# Altium PCB giro.PcbDoc
Units mm, origin at the board's own origin, x right, y up, seen from the top; angles counter-clockwise.
Board outline 28.43 x 24.86 mm, 2 copper layers (Top Layer, Bottom Layer); 11 components, 10 nets, 42 pads, 0 vias.
Unrouted connection lines stored in the file: 1.
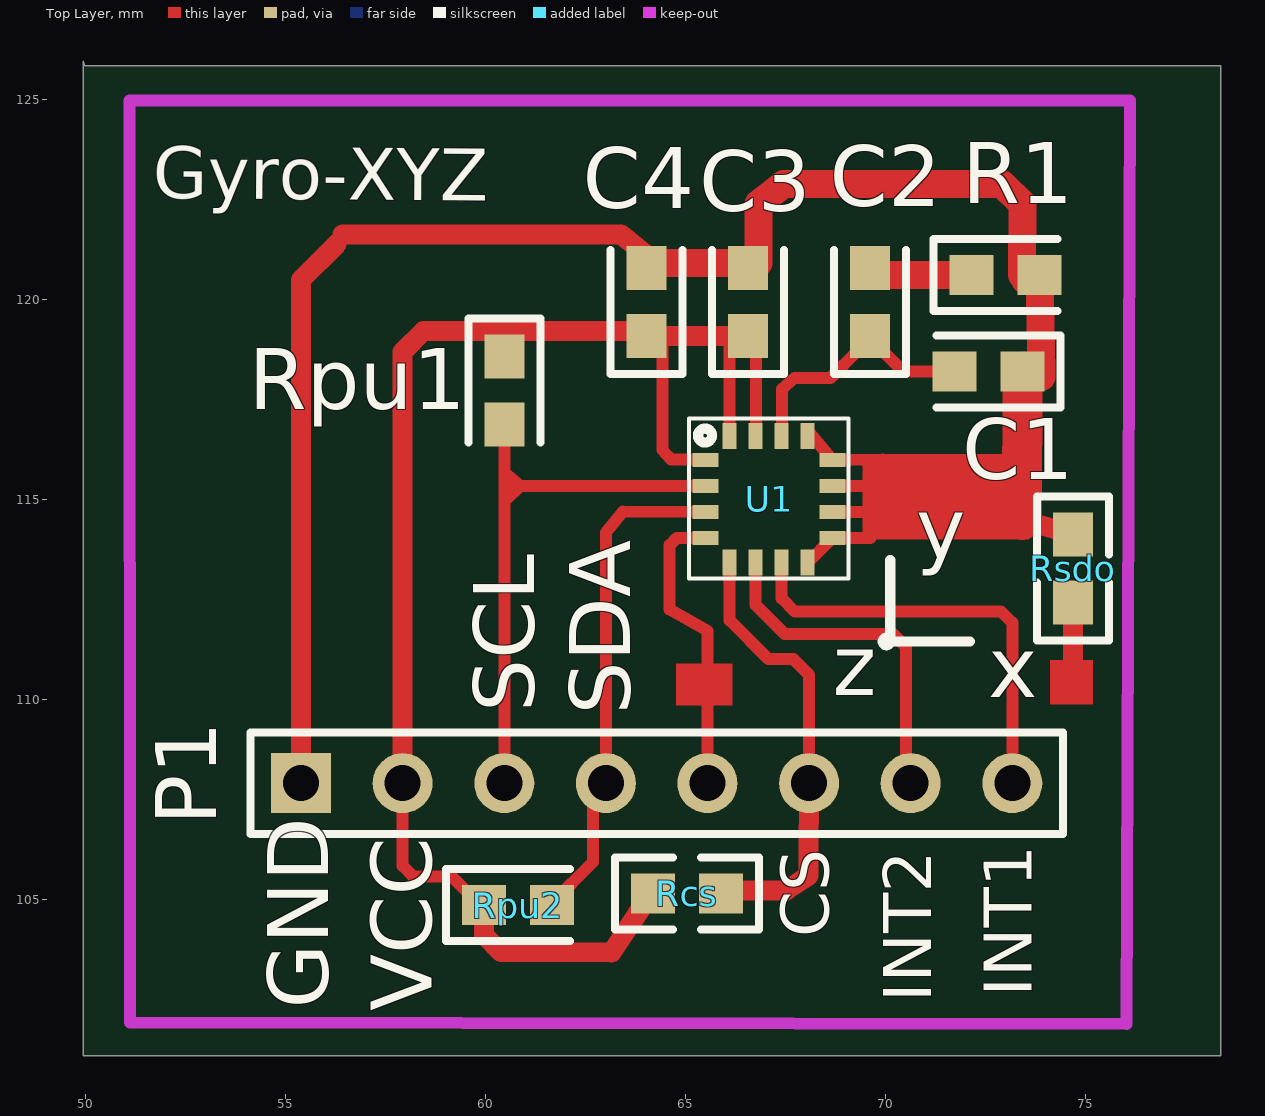
[diagram p0: Top Layer view]
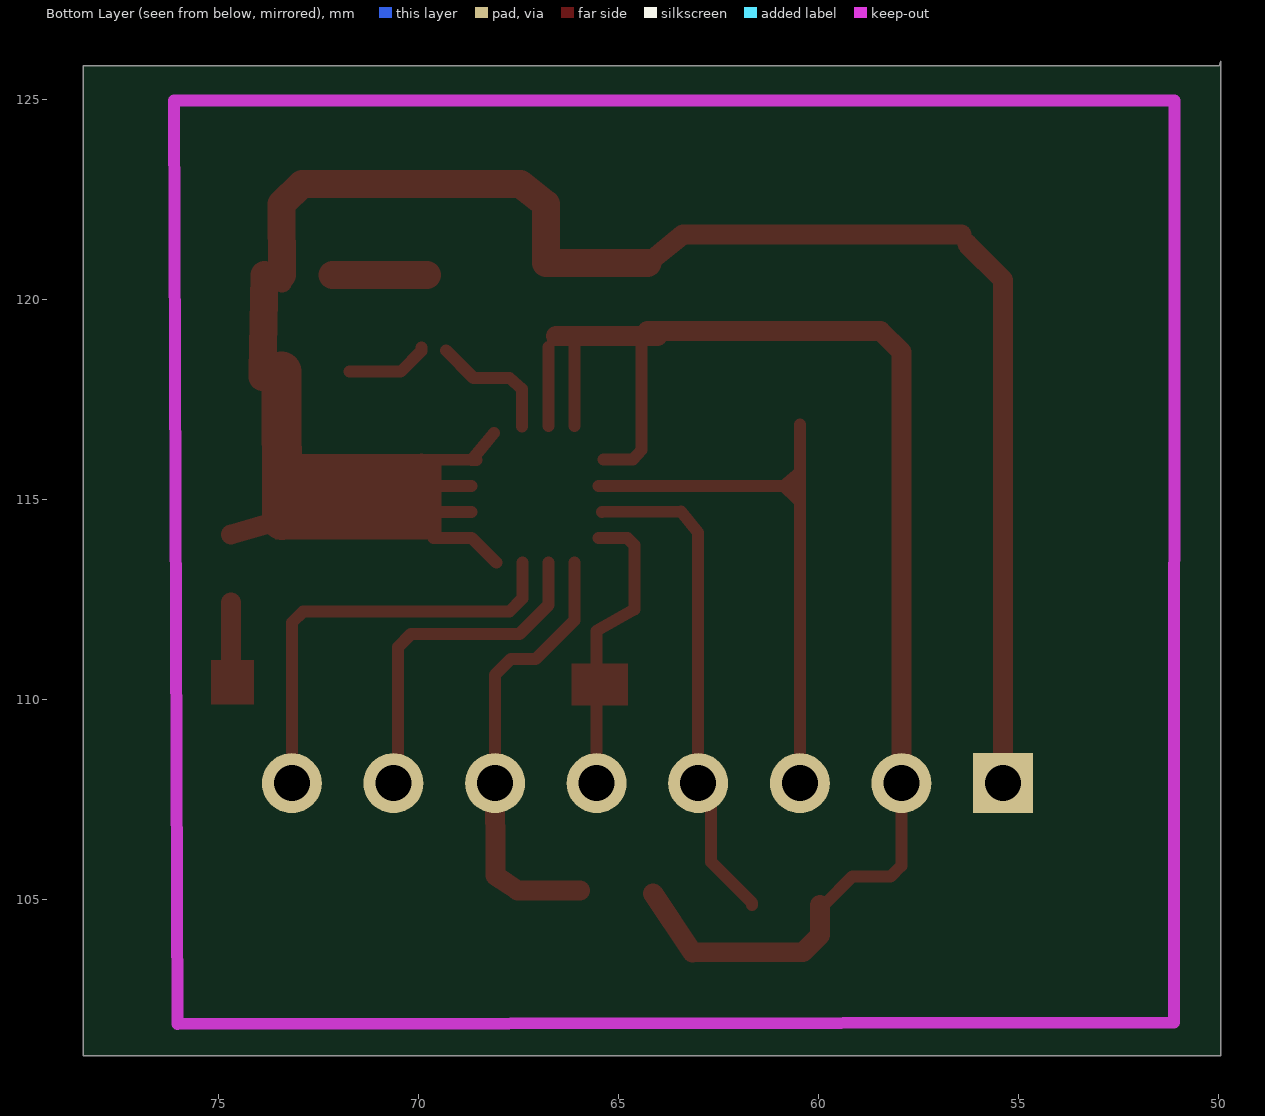
[diagram p1: Bottom Layer view, seen from below]

## Layer stack, top to bottom
Top Layer: signal copper 0.0356
Dielectric: dielectric 0.32, FR-4, Dk 4.8
Bottom Layer: signal copper 0.0356

## Board outline
49.937,125.962 49.937,101.102 78.37,101.102 78.37,125.854 49.974,125.854

## Design rules (kind name [scope] priority, off if disabled: settings)
Clearance [All] p1: gap=0.2
ComponentClearance [All] p1: gap=0.2 collisioncheckmode=0
PolygonConnect [All] p1: connectstyle=Relief reliefconductorwidth=0.254 reliefentries=4 polygonreliefangle="90 Angle"
RoutingVias [All] p1: holewidth=0.6 width=1 viastyle="Through Hole" minholewidth=0.711 minwidth=1.27 maxholewidth=0.711 maxwidth=1.27
SolderMaskExpansion [All] p1: expansion=0.102
TestPointUsage [All] p1: valid=0 allowmultiple=FALSE
Testpoint [All] p1: side=15 testpointundercomponent=TRUE minsize=1.016 maxsize=2.54 preferedsize=1.524 minholesize=0 maxholesize=1.016 preferedholesize=0.813 testpointgrid=0.025 style=1023 order=1234567890
Width [All] p1: maxlimit=1 minlimit=0.2 preferedwidth=0.5
17 further rules are at their usual default settings.

## Components (designator, comment, footprint, x,y, rotation, side; value= is the part's Value field where it differs from the comment)
C1 "10nF" 0603 73.413,118.203 r180 top
C2 "470nF" 0603 69.603,119.092 r90 top
C3 "10uF" 0603 66.555,119.092 r90 top
C4 "100nF" 0603 64.015,119.092 r90 top
P1 "Header 8" HDR1X8 55.379,107.916 r0 top
R1 "10k" 0603 72.143,120.616 r0 top
Rcs "Res3" C1608-0603 65.024,105.156 r0 top
Rpu1 "10k" 0603 60.459,118.584 r270 top
Rpu2 "10k" 0603 59.951,104.868 r0 top
Rsdo "Res3" C1608-0603 74.676,113.284 r270 top
U1 "L3G4200D" L3G4200D 67.063,115.028 r0 top

## Footprints (in the part's own frame and the unit in brackets; to place one, negate y for a bottom-side part, rotate by r counter-clockwise, add the part's x,y. Pads: shape width x height; smd on the part's side, far side on the other; paste and mask are expansions set on the pad)
0603 [mm] "0603"
  rect 1.1x1 smd: 1(0,0) 2(1.7,0)
  silkscreen extent -0.95,-0.9 2.15,0.9
C1608-0603 [mm]
  rect 1.1x1 smd: 1(-0.85,0) 2(0.85,0)
  silkscreen extent -1.8,-0.9 1.8,0.9
HDR1X8 [mm] "Connector; Header; 8 Position"
  rect 1.5x1.5 hole 0.9: 1(0,0)
  round 1.5 hole 0.9: 2(2.54,0) 3(5.08,0) 4(7.62,0) 5(10.16,0) 6(12.7,0) 7(15.24,0) 8(17.78,0)
  silkscreen extent -1.27,-1.27 19.05,1.27
L3G4200D [mm] "Giro 3-Axis"
  rect 0.65x0.35 smd: 1(-1.57,0.97) 2(-1.57,0.32) 3(-1.57,-0.33) 4(-1.57,-0.98) 9(1.6,-0.98) 10(1.6,-0.33) 11(1.6,0.32) 12(1.6,0.97)
  rect 0.35x0.65 smd: 5(-0.97,-1.6) 6(-0.32,-1.6) 7(0.33,-1.6) 8(0.98,-1.6) 13(0.98,1.57) 14(0.33,1.57) 15(-0.32,1.57) 16(-0.97,1.57)
  silkscreen extent -1.99,-1.99 2,2

## Part data
C1 C2 C3 C4: library part Cap, "Capacitor"
P1: "Header, 8-Pin"
R1 Rpu1 Rpu2: library part "Res Semi", "Semiconductor Resistor"
Rcs Rsdo: "Resistor"
U1: "Giro 3 axis"

## Nets (pads, with @x,y where several pads share a name; then routed paths per layer and width w, separated by ;. In a path a pad name is that pad's centre, name@x,y a point inside that pad or via, vN(x,y) a via of type N, cw(c..) or ccw(c..) an arc to the next point about the centre after c; other vN are vias at no path point)
CS: P1.6 Rcs.2 U1.5 | length 11.5
  Top Layer w0.3: U1.5 66.093,111.99 67.062,111.021 67.685,111.021 68.079,110.627 P1.6
  Top Layer w0.5: Rcs.2@65.955,105.237 67.515,105.237 68.071,105.607 P1.6@68.079,108.165
DRDY/INT2: P1.7 U1.6 | length 8.5
  Top Layer w0.3: U1.6 66.743,112.37 67.468,111.645 70.179,111.645 70.505,111.319 P1.7@70.505,108.03
GND: C1.1 C3.2 C4.2 P1.1 R1.2 Rsdo.1 U1.8 U1.9 U1.10 U1.11 U1.12 U1.13 | length 48.5
  Top Layer w0.3: U1.8 U1.9 69.611,114.048 ; U1.13@68.109,116.666 U1.12 ; U1.12@68.536,115.998 U1.12 ; U1.10 69.616,114.698 ; U1.11 69.631,115.348 ; 69.92,116.011 U1.12
  Top Layer w0.5: P1.1 55.379,120.502 56.27,121.393 ; 56.419,121.635 63.38,121.632 64.176,120.993 C4.2@64.269,120.919 ; 73.406,114.5 Rsdo.1 ; R1.2@73.406,120.432 R1.2@73.407,120.618
  Top Layer w0.7: C4.2@64.269,120.919 66.809,120.919 66.809,122.394 67.444,122.902 72.905,122.902 73.413,122.394 R1.2@73.407,120.618 ; R1.2 73.893,118.213 C1.1@73.896,118.077
  Top Layer w1: 73.406,114.5 C1.1
INT1: P1.8 U1.7 | length 10.9
  Top Layer w0.3: U1.7 67.393,112.536 67.722,112.207 72.88,112.207 73.159,111.928 P1.8
NetC1_2: C1.2 C2.1 U1.14 | length 5.3
  Top Layer w0.3: U1.14@67.402,116.84 67.402,117.775 67.715,118.049 68.616,118.047 C2.1@69.306,118.737 ; C2.1@69.921,118.807 69.921,118.722 70.44,118.203 C1.2
NetC2_2: C2.2 R1.1 | length 2.4
  Top Layer w0.7: C2.2@69.781,120.617 R1.1
SCL/SPC: P1.3 Rpu1.2 U1.2 | length 14.1
  Top Layer w0.3: P1.3 60.459,115.098 Rpu1.2 ; 60.531,115.026 60.853,115.348 U1.2
SDA/SDI/SDO: P1.4 Rpu2.2 U1.3 | length 12.1
  Top Layer w0.3: Rpu2.2 61.651,104.92 62.68,105.949 P1.4@62.68,107.597 ; P1.4 62.999,114.179 63.426,114.704 U1.3@65.4,114.699
SDO/SA0: P1.5 Rsdo.2 U1.4 | length 8.9
  Top Layer w0.3: U1.4 64.772,114.048 64.592,113.868 64.592,112.26 65.539,111.727 P1.5
  Top Layer w0.5: 74.676,110.982 Rsdo.2
VCC: C3.1 C4.1 P1.2 Rcs.1 Rpu1.1 Rpu2.1 U1.1 U1.15 U1.16 | length 38.4
  Top Layer w0.3: P1.2 57.919,105.852 58.186,105.585 59.148,105.585 59.865,104.868 Rpu2.1 ; C4.1@64.416,119.062 64.412,116.247 64.626,116.007 U1.1@65.366,116.007 ; U1.16@66.088,116.846 C3.1@66.088,119.081 ; U1.15@66.748,116.846 C3.1@66.748,118.821
  Top Layer w0.5: P1.2 57.919,118.7 58.441,119.222 60.285,119.222 64.015,119.219 C4.1@64.269,119.219 ; Rpu2.1 59.951,104.122 60.381,103.692 63.143,103.686 Rcs.1@64.128,105.163 ; C4.1 C3.1

## Keep-outs
Keep-Out Layer:
  lines w0.3: 51.094,124.981 51.099,101.931 76.015,101.895 76.105,124.99 51.094,124.981

## Other copper
Top Layer:
  rectangle net SDO/SA0: 74.099,109.886 75.182,111.001
  rectangle net SDO/SA0: 64.751,109.853 66.161,110.903
  region net SCL/SPC: 60.544,115.811 60.304,115.523 60.806,115.105 61.046,115.394
  rectangle net GND: 69.411,114.003 73.581,116.141

## Silkscreen, mask and mechanical layers (free items; w line width, h text height)
Top Overlay:
  circle w0.254: c70.015,111.46 r0.093
  lines w0.254: 70.108,113.499 70.108,111.46 72.1,111.46
  text "Gyro-XYZ" at 51.669,122.534 h1.3 r359.56
  text "y" at 70.756,113.545 h1.52
  text "z" at 68.671,110.117 h1.52
  text "x" at 72.563,110.07 h1.52
  text "SCL" at 61.208,109.689 h1.52 r90
  text "SDA" at 63.603,109.624 h1.52 r90
  text "CS" at 68.576,104.059 h1.2 r90
  text "INT1" at 73.642,102.577 h1.2 r90
  text "INT2" at 71.134,102.443 h1.2 r90
  text "GND" at 56.058,102.276 h1.52 r90
  text "VCC" at 58.65,102.21 h1.52 r90